# Altium PCB PCB1.PcbDoc
Units mm, origin at the board's own origin, x right, y up, seen from the top; angles counter-clockwise.
Board outline 121.87 x 131.67 mm, 2 copper layers (Top Layer, Bottom Layer), stack 1.534 mm thick; 49 components, 40 nets, 144 pads, 36 vias.
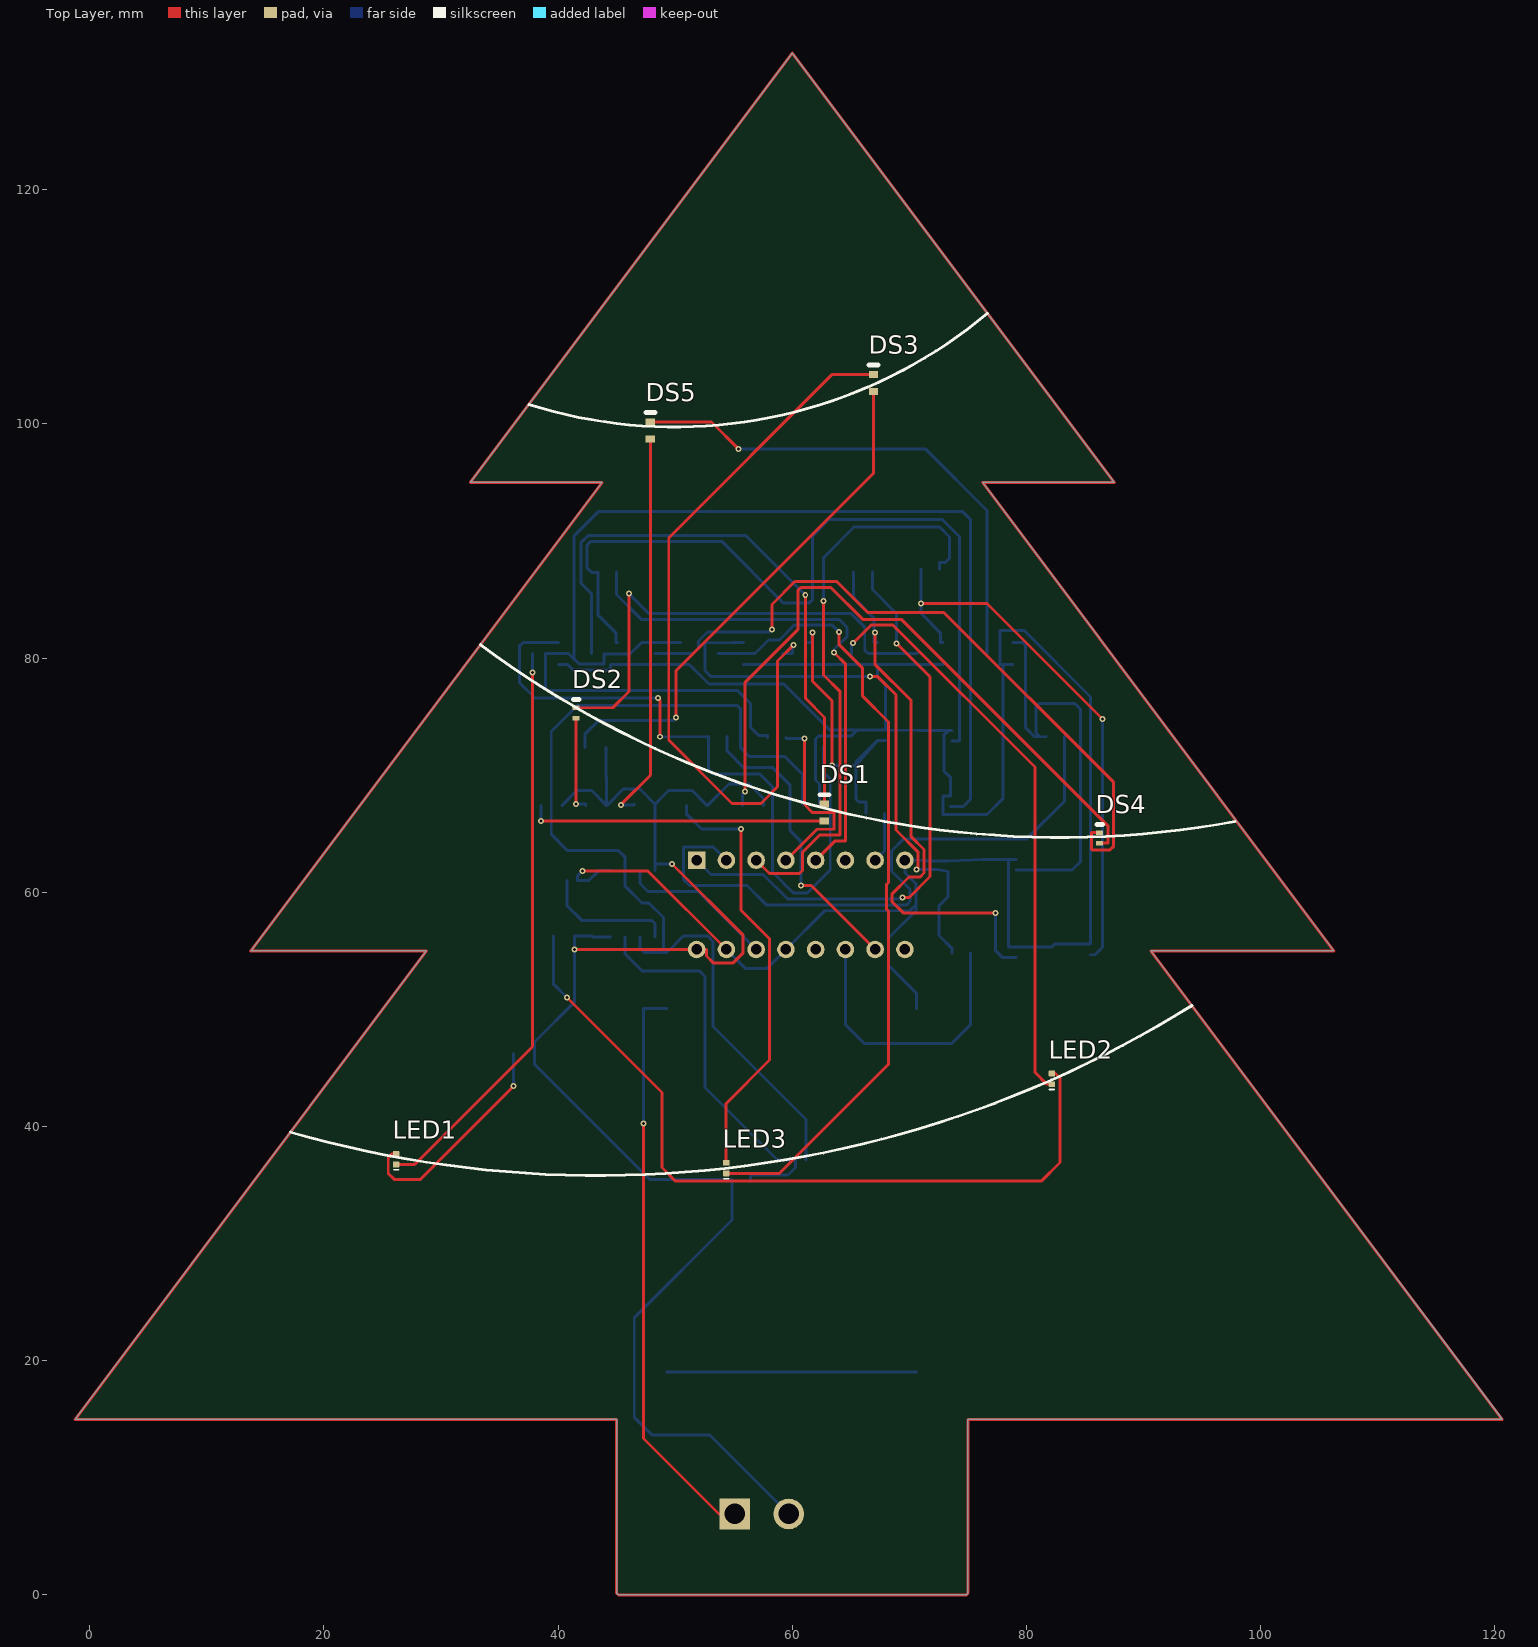
[diagram p0: Top Layer view]
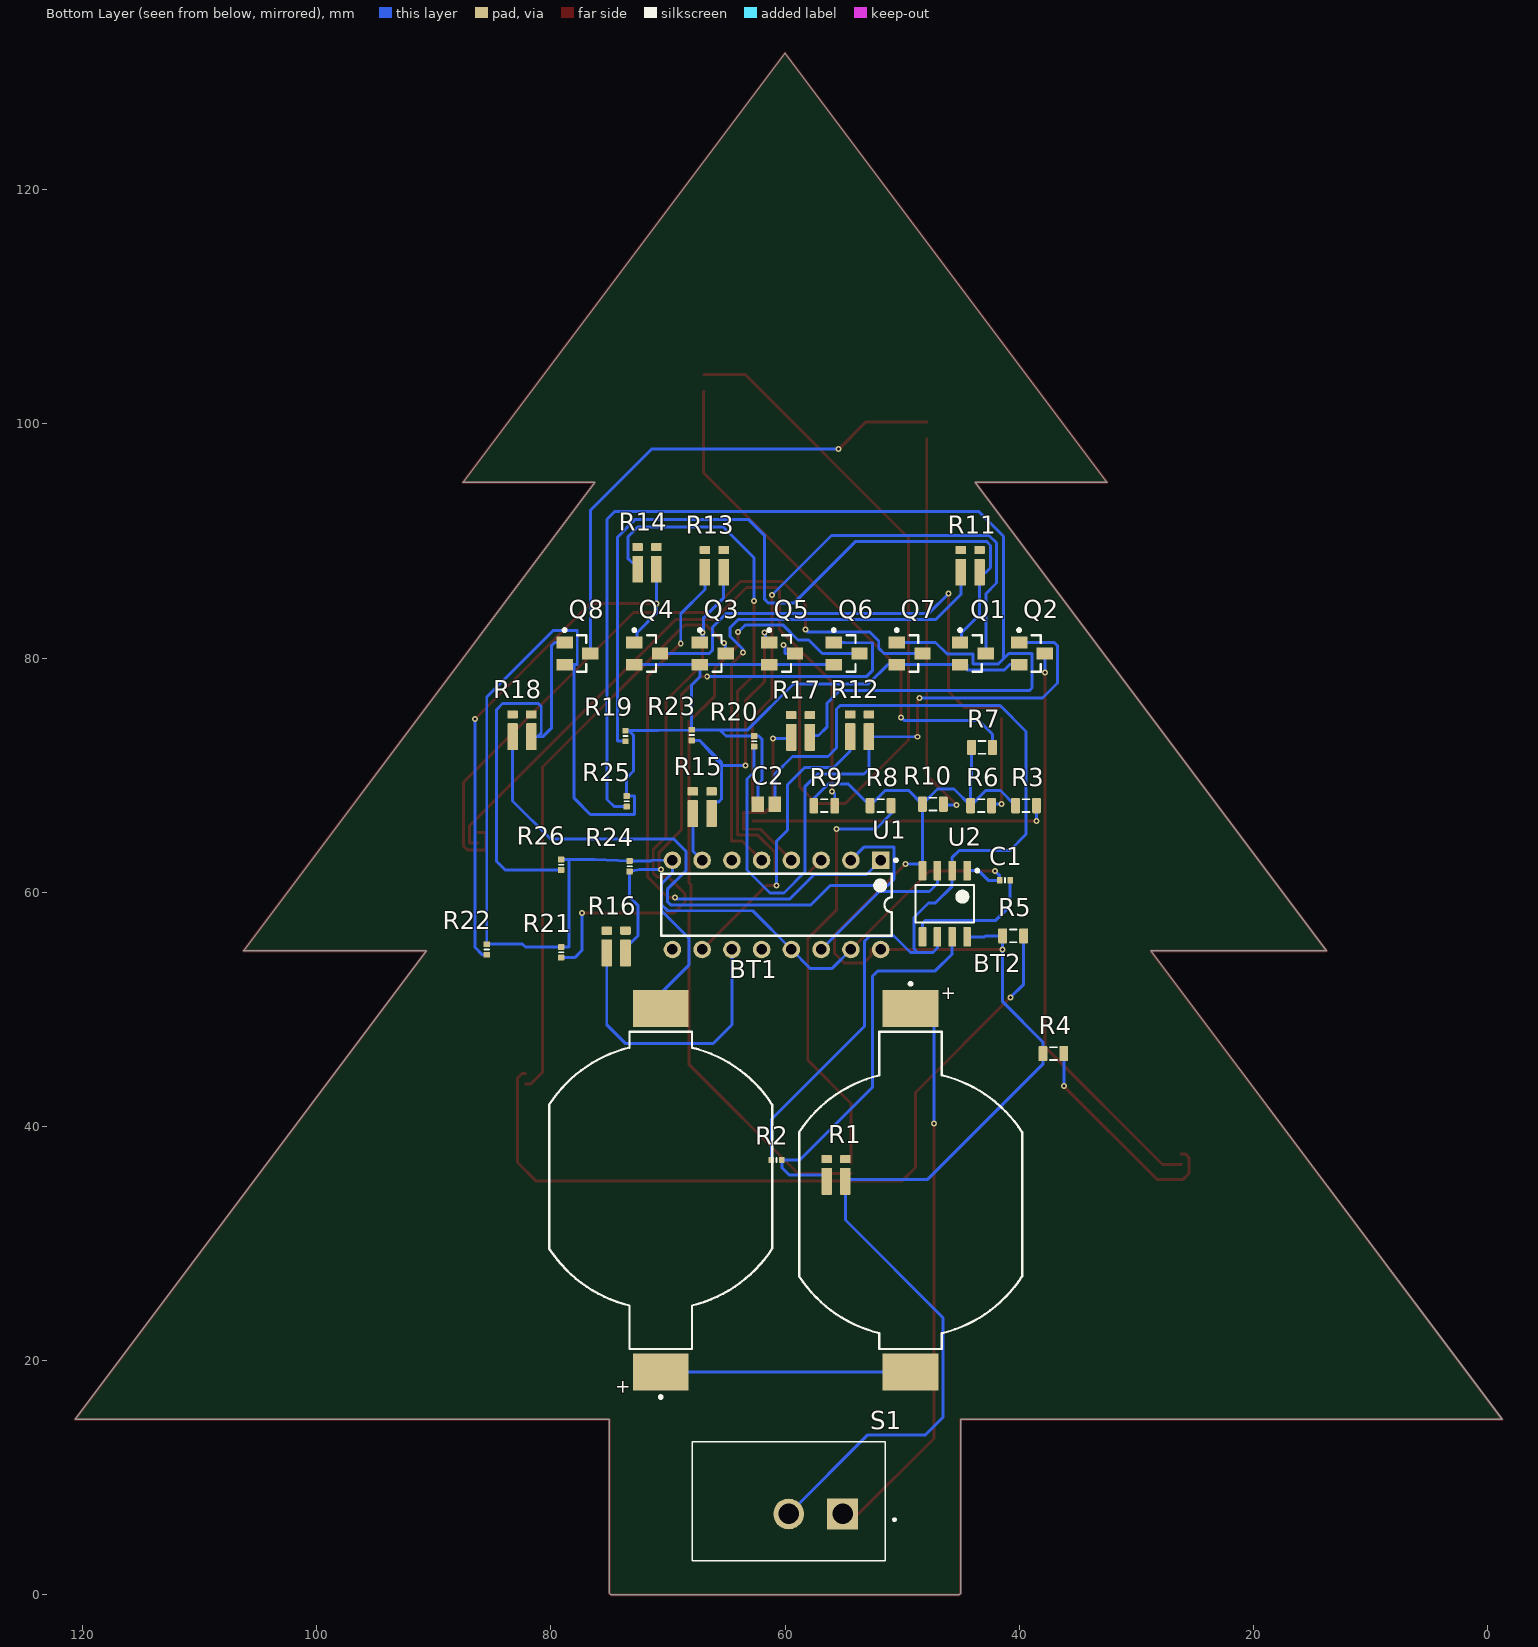
[diagram p1: Bottom Layer view, seen from below]
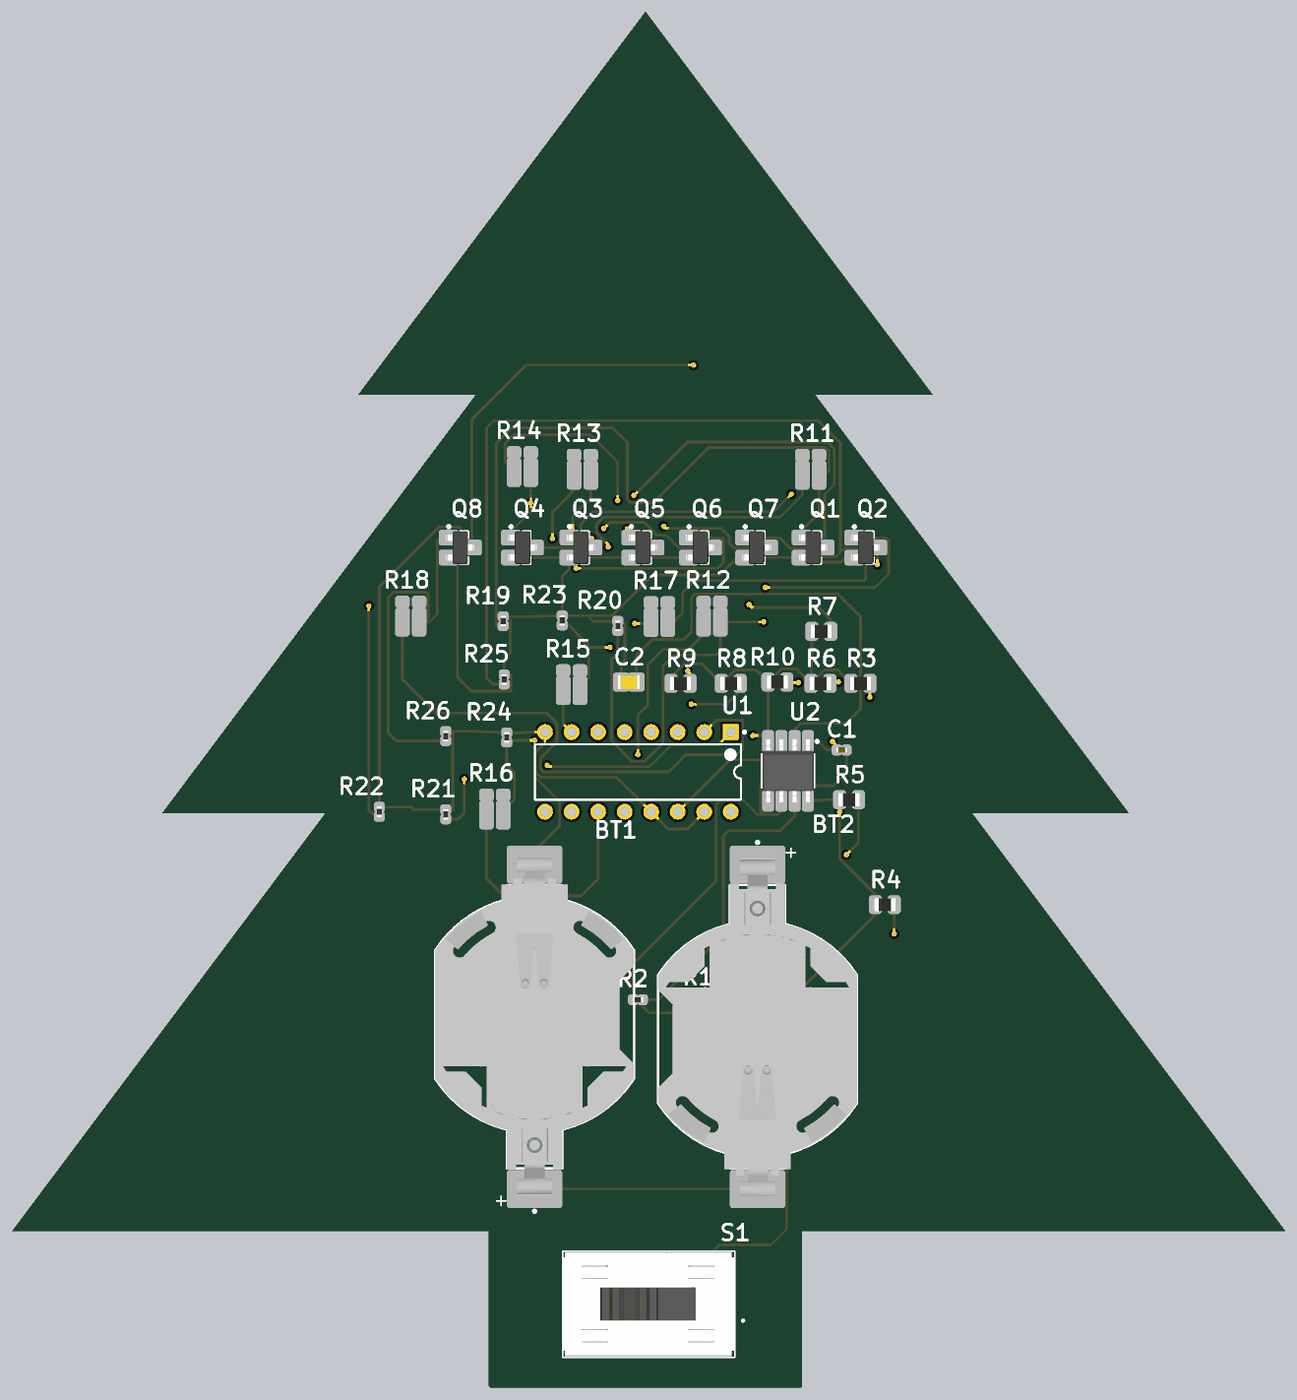
[diagram p2: 3D render of the assembled board from below, using the file's embedded part models]

## Layer stack, top to bottom
Top Solder: solder mask 0.0127, Solder Resist, Dk 3.3
Top Layer: signal copper 0.0178
Dielectric1: core 1.4986, FR-4, Dk 4.3
Bottom Layer: signal copper 0.0178
Bottom Solder: solder mask 0.0127, Solder Resist, Dk 3.3

## Board outline
7.5,15 45,15 45,0.149 45.149,0 74.851,0 75,0.149 75,15 112.5,15 120.625,15 90.625,55 106.25,55 76.25,95 87.5,95 60,131.667 32.5,95 43.75,95 13.75,55 28.75,55 -1.25,15

## Design rules (kind name [scope] priority, off if disabled: settings)
Clearance [All] p1: gap=0.254 ignorepadtopadclearanceinfootprint=FALSE
DiffPairsRouting [All] p1: maxlimit=0.254 minlimit=0.254 mostfreqgap=0.254 toplayer_minwidth=0.254 toplayer_maxwidth=0.254 toplayer_prefwidth=0.254 bottomlayer_minwidth=0.254 bottomlayer_maxwidth=0.254 bottomlayer_prefwidth=0.254 maxuncoupledlength=12.7
HoleSize [All] p1: absolutevalues=TRUE maxlimit=7.62 minlimit=0.254 maxpercent=80.000 minpercent=20.000
MinimumAnnularRing [All] p1: minimumring=0.254
PasteMaskExpansion [All] p1: expansion=0.254
PlaneClearance [All] p1: clearance=0.381
PlaneConnect [All] p1: pad.planeconnectstyle=Relief pad.reliefexpansion=0.508 pad.reliefentries=4 pad.reliefconductorwidth=0.254 pad.reliefairgap=0.254 via.planeconnectstyle=Direct via.reliefexpansion=0.508 via.reliefentries=4 via.reliefconductorwidth=0.254 via.reliefairgap=0.254
PolygonConnect [All] p1: thpad.connectstyle=Relief thpad.reliefconductorwidth=0.254 thpad.reliefentries=4 thpad.polygonreliefangle="90 Angle" thpad.airgapwidth=0.254 smdpad.connectstyle=Relief smdpad.reliefconductorwidth=0.254 smdpad.reliefentries=4 smdpad.polygonreliefangle="90 Angle" smdpad.airgapwidth=0.254 via.connectstyle=Direct via.reliefconductorwidth=0.254 via.reliefentries=4 via.polygonreliefangle="90 Angle" via.airgapwidth=0.254
RoutingVias [All] p1: holewidth=0.254 width=0.508 viastyle="Through Hole" minholewidth=0.254 minwidth=0.508 maxholewidth=0.254 maxwidth=0.508
SMDNeckDown [All] p1: percent=100.000
SilkToSolderMaskClearance SilkscreenOverComponentPads [IsPad] p1: minsilkscreentomaskgap=0.254 clearancetoexposedcopper=TRUE
SolderMaskExpansion [All] p1: expansion=0.254 istentingtop=FALSE
Width [All] p1: maxlimit=0.254 minlimit=0.254 preferedwidth=0.254
24 further rules are at their usual default settings.

## Components (designator, comment, footprint, x,y, rotation, side; value= is the part's Value field where it differs from the comment)
BT1 "796136-1" TECO-796136-1_V 70.612,34.544 r90 bottom
BT2 "796136-1" TECO-796136-1_V 49.276,34.544 r270 bottom
C1 "Capacitor 10nF +/-20% 50V 0402" CAPC0402(1005)60_L 41.217,61.024 r180 bottom value=10nF
C2 "Capacitor 100 nF +/-10% 50 V 0805" CAPC2013X95X50LL10T25 61.595,67.527 r180 bottom value=100nF
DS1 "TLMS1100-GS08" VISH-TLMX1100_V 62.738,66.802 r90 top
DS2 "16-219A/T2D-AR2T1QY/3T" EVRL-0402-2_V 41.529,75.311 r90 top
DS3 "TLMS1100-GS08" VISH-TLMX1100_V 66.929,103.505 r90 top
DS4 "16-219A/T2D-AR2T1QY/3T" EVRL-0402-2_V 86.233,64.643 r90 top
DS5 "TLMS1100-GS08" VISH-TLMX1100_V 47.879,99.441 r90 top
LED1 "QBLP595-IG" QTB-QBLP595_V 26.162,37.211 r90 top
LED2 "QBLP595-IG" QTB-QBLP595_V 82.169,44.069 r90 top
LED3 "QBLP595-IG" QTB-QBLP595_V 54.356,36.449 r90 top
Q1 "BSS138" FAIR-SOT23-3_V 43.953,80.391 r180 bottom
Q2 "BSS138" FAIR-SOT23-3_V 38.913,80.391 r180 bottom
Q3 "BSS138" FAIR-SOT23-3_V 66.173,80.391 r180 bottom
Q4 "BSS138" FAIR-SOT23-3_V 71.773,80.391 r180 bottom
Q5 "BSS138" FAIR-SOT23-3_V 60.245,80.391 r180 bottom
Q6 "BSS138" FAIR-SOT23-3_V 54.737,80.391 r180 bottom
Q7 "BSS138" FAIR-SOT23-3_V 49.358,80.391 r180 bottom
Q8 "BSS138" FAIR-SOT23-3_V 77.724,80.391 r180 bottom
R1 "KRL3216T4A-M-R007-F-T1" SUSUMU-3216T4A 55.643,35.869 r180 bottom value=7M
R2 "Resistor 1M +/-1 % 0402 63 mW" RESC0402(1005)_L 60.723,37.139 r180 bottom value=1M
R3 "Resistor 470R +/-5% 0805 125 mW" RESC0805(2012)_L 39.413,67.4 r180 bottom value=470
R4 "Resistor 470R +/-5% 0805 125 mW" RESC0805(2012)_L 37.084,46.228 r180 bottom value=470
R5 "Resistor 470R +/-5% 0805 125 mW" RESC0805(2012)_L 40.513,56.278 r180 bottom value=470
R6 "Resistor 470R +/-5% 0805 125 mW" RESC0805(2012)_L 43.248,67.4 r180 bottom value=470
R7 "Resistor 470R +/-5% 0805 125 mW" RESC0805(2012)_L 43.173,72.377 r180 bottom value=470
R8 "Resistor 470R +/-5% 0805 125 mW" RESC0805(2012)_L 51.833,67.4 r180 bottom value=470
R9 "Resistor 470R +/-5% 0805 125 mW" RESC0805(2012)_L 56.642,67.4 r180 bottom value=470
R10 "Resistor 470R +/-5% 0805 125 mW" RESC0805(2012)_L 47.371,67.527 r180 bottom value=470
R11 "KRL3216T4A-M-R007-F-T1" SUSUMU-3216T4A 44.189,87.884 r180 bottom value=7M
R12 "KRL3216T4A-M-R007-F-T1" SUSUMU-3216T4A 53.637,73.837 r180 bottom value=7M
R13 "KRL3216T4A-M-R007-F-T1" SUSUMU-3216T4A 66.04,87.884 r180 bottom value=7M
R14 "KRL3216T4A-M-R007-F-T1" SUSUMU-3216T4A 71.786,88.138 r180 bottom value=7M
R15 "KRL3216T4A-M-R007-F-T1" SUSUMU-3216T4A 67.073,67.273 r180 bottom value=7M
R16 "KRL3216T4A-M-R007-F-T1" SUSUMU-3216T4A 74.422,55.372 r180 bottom value=7M
R17 "KRL3216T4A-M-R007-F-T1" SUSUMU-3216T4A 58.674,73.787 r180 bottom value=7M
R18 "KRL3216T4A-M-R007-F-T1" SUSUMU-3216T4A 82.461,73.837 r180 bottom value=7M
R19 "2D26MR2F" RESC0402(1005)_L 73.622,73.352 r90 bottom value=2.26M
R20 "2D26MR2F" RESC0402(1005)_L 62.645,72.902 r90 bottom value=2.26M
R21 "2D26MR2F" RESC0402(1005)_L 79.121,54.872 r90 bottom value=2.26M
R22 "2D26MR2F" RESC0402(1005)_L 85.471,55.118 r90 bottom value=2.26M
R23 "2D26MR2F" RESC0402(1005)_L 67.973,73.427 r90 bottom value=2.26M
R24 "2D26MR2F" RESC0402(1005)_L 73.277,62.228 r90 bottom value=2.26M
R25 "2D26MR2F" RESC0402(1005)_L 73.522,67.773 r90 bottom value=2.26M
R26 "2D26MR2F" RESC0402(1005)_L 79.121,62.357 r90 bottom value=2.26M
S1 "GF-123-0054" SW_GF-123-0054 59.69,8.001 r0 bottom
U1 "CD4022BE" N0016A 60.723,58.928 r270 bottom
U2 "LM555CM/NOPB" D0008A_M 46.358,59.024 r270 bottom

## Footprints (in the part's own frame and the unit in brackets; to place one, negate y for a bottom-side part, rotate by r counter-clockwise, add the part's x,y. Pads: shape width x height; smd on the part's side, far side on the other; paste and mask are expansions set on the pad)
CAPC0402(1005)60_L [mm] "Chip Capacitor, Body 1.0x0.5mm, Height 0.6mm, IPC High Density"
  rrect25% 0.5x0.55 smd: 1(-0.45,0) 2(0.45,0)
  silkscreen extent 0,-0.2 0,0.2, body extent -0.5,-0.25 0.5,0.25, height 0.6
CAPC2013X95X50LL10T25 [mm] "Chip Capacitor, 2-Leads, Body 2.10x1.35mm, IPC High Density"
  rect 1.05x1.3 smd: 1(-0.725,0) 2(0.725,0)
  body extent -1.05,-0.67 1.05,0.67, height 0.95
D0008A_M [mm] "SOIC, 8-Leads, Body 5x4mm, Pitch 1.27mm, IPC Low Density"
  rrect15% 1.65x0.65 smd: 1(-2.825,1.905) 2(-2.825,0.635) 3(-2.825,-0.635) 4(-2.825,-1.905) 5(2.825,-1.905) 6(2.825,-0.635) 7(2.825,0.635) 8(2.825,1.905)
  silkscreen extent -2.95,-2.5 1.6,2.9, body extent -3,-2.45 3,2.45, height 1.63
EVRL-0402-2_V [mm] "SMD, 2-Leads, Body 1x0.5mm"
  rect 0.4x0.6 smd: 1(-0.45,0) 2(0.45,0)
  silkscreen extent 1.15,-0.25 1.15,0.25, body extent -0.5,-0.25 0.5,0.25, height 0.25
FAIR-SOT23-3_V [mm] "SOT23, 3-Leads, Body 3.12x1.5mm, Pitch 0.95mm"
  rect 1.4x1 smd: 1(-1.1,0.95) 2(-1.1,-0.95) 3(1.1,0)
  silkscreen extent -1.23,-1.55 0.75,2.12, body extent -1.35,-1.56 1.35,1.56, height 1.2
N0016A [mm] "DIP, 16-Leads, Body 19.7x6.6mm, Pitch 2.54mm"
  rect 1.5x1.5 hole 0.9: 1(-3.81,8.89)
  round 1.5 hole 0.9: 2(-3.81,6.35) 3(-3.81,3.81) 4(-3.81,1.27) 5(-3.81,-1.27) 6(-3.81,-3.81) 7(-3.81,-6.35) 8(-3.81,-8.89) 9(3.81,-8.89) 10(3.81,-6.35) 11(3.81,-3.81) 12(3.81,-1.27) 13(3.81,1.27) 14(3.81,3.81) 15(3.81,6.35) 16(3.81,8.89)
  silkscreen extent -3.93,-9.85 2.65,10.31, body extent -3.95,-9.85 3.95,9.85, height 5.08
QTB-QBLP595_V [mm] "SMD, 2-Leads, Body 1x0.5mm"
  rrect25% 0.5x0.55 smd: 1(-0.455,0) 2(0.455,0)
  silkscreen extent -0.9,-0.2 -0.9,0.2, body extent -0.5,-0.25 0.5,0.25, height 0.5
RESC0402(1005)_L [mm] "Chip Resistor, Body 1.0x0.5mm, IPC High Density"
  rrect25% 0.5x0.55 smd: 1(-0.45,0) 2(0.45,0)
  silkscreen extent 0,-0.2 0,0.2, body extent -0.5,-0.25 0.5,0.25, height 0.3
RESC0805(2012)_L [mm] "Chip Resistor, Body 2.0x1.3mm, IPC High Density"
  rrect25% 0.76x1.3 smd: 1(-0.9,0) 2(0.89,0)
  silkscreen extent -0.3,-0.55 0.3,0.55, body extent -1,-0.62 1,0.63, height 0.6
SUSUMU-3216T4A [mm] "SMD, 4-Leads, Body 3.2x1.6mm"
  rrect15% 0.9x2.3 smd: 1(-0.8,-0.55) 2(0.8,-0.55)
  rrect20% 0.9x0.7 smd: 3(-0.8,1.35) 4(0.8,1.35)
  body extent -0.8,-1.6 0.8,1.6, height 0.55
SW_GF-123-0054 [mm]
  rect 2.625x2.625 hole 1.75: 1(-4.6,1.09)
  round 2.625 hole 1.75: 2(0,1.09)
  silkscreen extent -9.14,-5.08 8.23,5.08, body extent -8.18,-5.11 8.28,5.05, height 13.22
TECO-796136-1_V [mm] "SMD, 2-Leads, Body 32.31x19.05mm"
  rect 3.15x4.78 smd: 1(-15.52,0) 2(15.52,0)
  silkscreen extent -17.77,-9.52 13.54,9.53, body extent -16.16,-9.53 16.17,9.52, height 6.52
VISH-TLMX1100_V [mm] "SMD, 2-Leads, Body 1.6x0.8mm"
  rect 0.6x0.8 smd: 1(-0.725,0) 2(0.725,0)
  silkscreen extent 1.52,-0.4 1.52,0.4, body extent -0.8,-0.4 0.8,0.4, height 0.65

## Part data
BT1 BT2: library part CMP-002-00002-2, "Battery Connector, 1 Cell, CR2032, 2-Pin SMD, RoHS, Tape and Reel", Colour=Black, Manufacturer="TE Connectivity", Max Voltage Rating (AC)=30V, Package Description="2-Pin Surface Mount Device, Body 32.31 x 19.05 mm", Package Quantity=400, Batteries=1, Case/Package=796136-1, Connector Type=BatteryHolder, Contact Material=Bronze, Contact Plating=Tin, Datasheet URL=http://www.te.com/commerce/DocumentDelivery/DDEController?Action=srchrtrv&DocNm=796136&DocType=Customer+Drawing&DocLang=English&DocFormat=pdf&PartCntxt=796136-1, Datasheet Version=Dec-13, Manufacturer URL=http://www.te.com/, Mounting Technology=SM, Package Reference=796136-1, Packaging=TapeandReel, Pins=2, RoHS Compliant=True
C1: library part CMP-001-00069-3, "Chip Capacitor, 10nF +/-20%, 50V, 0402, Thickness 0.6 mm", Case/Package=0402, Max Operating Temperature=85°C, Min Operating Temperature=-55°C, Tolerance=5%, Voltage Rating=50V, Mounting Technology=SMT, Pins=2
C2: library part CMP-001-00018-6, "Chip Capacitor, 100 nF, +/- 10%, 50 V, 0805 (2012 Metric)", Capacitor Type=Ceramic, Case/Package=0805, Max Operating Temperature=125°C, Min Operating Temperature=-55°C, Tolerance=10%, Voltage Rating=50V, Mounting Technology=SM, Pins=2, RoHS Compliant=True
DS1 DS3 DS5: library part CMP-007-00030-2, "Red Led, 20mA, 2.1 V, -40 to 100 degC, 2-Pin SMD (0603), RoHS, Tape and Reel", Case/Package=0603, Colour=Red, Forward Current=20mA, Forward Voltage=2.1V, Manufacturer="Vishay Semiconductor", Max Operating Temperature=100°C, Min Operating Temperature=-40°C, Package Description="2-Pin Surface Mount Device, Body 1.6 x 0.8 mm", Package Quantity=3000, Package Reference=TLMX1100, Power=90mW, Datasheet URL=http://www.vishay.com/docs/83173/tlmb1100.pdf, Datasheet Version="Rev. 2.7, 03/2016", Illumination Colour=Red, Lens Style=Clear, Luminous Intensity=63mcd, Manufacturer URL=http://www.vishay.com/, Mounting Technology=SM, Nominal Vf=2.1V, Packaging=TapeandReel, Pins=2, RoHS Compliant=True, Viewing Angle=160degrees
DS2 DS4: library part CMP-007-00000-2, "Chip LED, White, 5 V, 10 mA, 30 mW, -40 to 85 degC, 2-Pin SMD (0402), RoHS, Tape and Reel", Case/Package=0402, Forward Current=5mA, Forward Voltage=2.6V, Illumination Colour=White, Manufacturer="Everlight Electronics", Max Operating Temperature=85°C, Min Operating Temperature=-40°C, Package Description="2-Pin Surface Mount Device, Body 1 x 0.5 mm", Package Quantity=3000, Power=30mW, Datasheet URL=http://www.everlight.com/file/ProductFile/16-219A-T2D-AR2T1QY-3T.pdf, Datasheet Version="Rev. 5, 04/2013", Luminous Intensity=360mcd, Manufacturer URL=http://www.everlight.com/, Mounting Technology=SM, Package Reference=0402, Packaging=TapeandReel, RoHS Compliant=True, Viewing Angle=130degrees
LED1 LED2 LED3: library part CMP-007-00041-3, "Chip LED 0402, Green, 0.02 A, 3.1 to 3.7 V, -40 to 80 degC, 2-Pin SMD, RoHS, Tape and Reel", Case/Package=0402, Colour=Green, Mounting Technology=SMT, Pins=2, RoHS Compliant=Yes
Q1 Q2 Q3 Q4 Q5 Q6 Q7 Q8: library part CMP-013-00021-4, "N-Channel Logic Level Enhancement Mode Field Effect Transistor, 220 mA, 50 V, -55 to 150 degC, 3-Pin SOT-23, RoHS, Tape and Reel", Case/Package=TO-236-3, Input Capacitance=27pF, Manufacturer=Fairchild, Max Operating Temperature=150°C, Min Operating Temperature=-55°C, Nominal Dual Supply Voltage=50V, Package Description="3-Pin Small Outline Transistor, Body 2.92 x 1.325 mm, Pitch 0.95 mm", Package Quantity=1, Package Reference=SOT23-3, Package Version="Rev. 12, 03/2016", Power=360mW, Resistance=0.7Ohm, Datasheet URL=https://www.fairchildsemi.com/datasheets/BS/BSS138.pdf, Datasheet Version="Rev. C, 10/2005", Elements=1, Mounting Technology=SM, Nominal Vgs=1.3V, Packaging=TapeandReel, Pins=3, Rds On Max=3.5Ohm, RoHS Compliant=True, Typical Rise Time=9ns
R1 R11 R12 R13 R14 R15 R16 R17 R18: library part CMP-009-00115-2, "RES SMD 0.007 OHM 1W 1206 WIDE", Case/Package=1206, Max Operating Temperature=155°C, Min Operating Temperature=-55°C, Tolerance=1%, Mounting Technology=SMT, Pins=4
R2: library part CMP-009-00165-3, "Chip Resistor, 1 MOhms, +/-1 %, 63 mW, -55 to 155 degC, 0402", Case/Package=0402, Power=63mW, Tolerance=1%, Pins=2
R3 R4 R5 R6 R7 R8 R9 R10: library part CMP-009-00122-3, "Chip Resistor, 470 Ohms, +/-5%, 125 mW, -55 to 155 degC, 0805", Case/Package=0805, Max Operating Temperature=155°C, Min Operating Temperature=-55°C, Power=125mW, Tolerance=5%, Pins=2
R19 R20 R21 R22 R23 R24 R25 R26: library part CMP-009-00086-2, "2M26 0.063W 1% 0402 (1005 Metric)  SMD", Case/Package=0402, Power=63mW, Tolerance=1%, Mounting Technology=SMT, Pins=2
S1: library part CMP-011-00013-2, "Slide Switch SPST Through Hole", Case/Package=None, Availability=Unavailable, Component Type=Standard, Design Item ID=GF-123-0054, MP=GF-123-0054, Pins=2, Price=None, Source=GF-123-0054.SchLib
U1: library part CMP-1623-00536-2, "CMOS Octal Counter with 8 Decoded Outputs, N0016A, TUBE", F @ Nom Voltage(Max)(Mhz)=8, Generic Part Number=CD4022B, ICC @ Nom Voltage(Max)(mA)=0.03, Manufacturer="Texas Instruments", Operating Temperature Range(C)="-55 to 125", Rating=Catalog, tpd @ Nom Voltage(Max)(ns)=270, Voltage(Nom)(V)=5,10,15, Bits(#)=10, Code_JEDEC=MS-001, DatasheetVersion=SCHS027C, Function=Counter, Input Type=CMOS, Inputs=1, Output Drive (IOL/IOH)(Max)(mA)=1.5/-1.5, Output Type=CMOS, PackageReference=N0016A, Schmitt Trigger=No, Technology Family=CD4000, Type=Decade, VCC(Max)(V)=18, VCC(Min)(V)=3
U2: library part CMP-0056-00105-3, "Timer, 8-pin Narrow SOIC, Pb-Free", Manufacturer="Texas Instruments", PackageTopMarking=NSZXTT*LM*555CM, PowerWise=N, Code_IPC=SOIC127P600-8, Code_JEDEC=MS-012-AA, ComponentLink1Description="Datasheet URL", ComponentLink1URL=http://www.ti.com/general/docs/lit/getliterature.tsp?genericPartNumber=LM555&fileType=pdf, CompType="Analog IC", PackageDescription="SOIC Narrow, 4.9 x 3.9 x 1.45mm, 8 Lead, 1.27mm Pitch", PackageReference=D0008A, PinCount=8, RoHS=Y

## Via types
v1: diameter 0.508, hole 0.254, Top Layer to Bottom Layer, 36 vias

## Nets (pads, with @x,y where several pads share a name; then routed paths per layer and width w, separated by ;. In a path a pad name is that pad's centre, name@x,y a point inside that pad or via, vN(x,y) a via of type N, cw(c..) or ccw(c..) an arc to the next point about the centre after c; other vN are vias at no path point)
GND: BT1.2 C1.1 C2.1 Q1.2 Q2.2 Q3.2 Q4.2 Q5.2 Q6.2 Q7.2 Q8.2 R19.2 R20.2 R21.2 R22.2 R23.2 R24.2 R25.2 R26.2 U1.8 U1.13 U1.15 U2.1 | length 207.1
  Top Layer w0.254: v1(42.08,61.828) 47.663,61.828 U1.15
  Bottom Layer w0.254: Q2.2 40.825,79.441 41.264,79.002 44.461,79.002 44.461,79.441 Q1.2 Q7.2 51.224,79.441 52.886,77.779 59.276,77.779 63.178,73.877 65.567,73.877 ; v1(42.08,61.828) 41.667,61.414 C1.1 42.639,61.024 43.464,61.849 U2.1 ; U1.15 56.012,53.479 57.814,53.479 U1.13 62.76,58.424 70.02,58.424 70.554,58.958 ; Q6.2 Q5.2 Q3.2 ; C2.1 62.32,69.249 61.969,69.6 61.969,73.08 62.241,73.352 R20.2 65.042,73.352 65.567,73.877 ; BT1.2 70.612,51.381 68.217,53.776 68.217,56.088 70.554,58.424 70.554,58.958 ; Q4.2 Q3.2 ; R19.2 73.322,73.802 ; Q8.2 78.007,79.441 ; R26.2 78.453,62.807 ; 65.567,73.877 R23.2 ; Q3.2 67.273,79.068 67.277,79.068 67.277,78.389 67.973,77.693 R23.2 ; R23.2 70.832,73.802 73.322,73.802 ; 70.554,58.958 70.554,60.74 69.613,61.681 U1.8 71.392,62.738 71.452,62.678 R24.2 76.245,62.807 78.453,62.807 ; 73.322,73.802 72.941,73.421 72.941,70.362 73.522,69.782 R25.2 72.865,68.223 72.865,66.654 76.624,66.654 78.007,68.036 78.007,79.441 ; 78.007,79.441 77.742,79.441 77.742,82.377 79.774,82.377 85.471,76.68 R22.2 82.408,55.568 82.162,55.322 R21.2 78.453,55.322 78.453,62.807
NetBT1_1: BT1.1 BT2.2 | length 21.3
  Bottom Layer w0.254: BT2.2 BT1.1
NetBT2_1: BT2.1 S1.1 | length 49.2
  Top Layer w0.254: v1(47.287,40.263) 47.287,13.365 53.741,6.911 S1.1
  Bottom Layer w0.254: v1(47.287,40.263) 47.287,50.064 BT2.1
NetC1_2: C1.2 U2.5 | length 11.4
  Bottom Layer w0.254: C1.2 40.767,58.856 42.011,57.612 47.983,57.612 48.263,57.332 U2.5
NetC2_2: C2.2 R2.1 U2.2 U2.6 | length 85.2
  Bottom Layer w0.254: U2.6 46.993,55.239 47.364,54.868 48.684,54.868 ; C2.2 60.87,70.089 59.352,71.607 56.33,71.607 55.593,72.344 55.593,75.646 55.288,75.95 41.623,75.95 39.413,73.741 39.413,64.952 40.785,63.581 45.128,63.581 45.723,62.986 U2.2 45.723,60.523 47.16,59.085 47.745,59.085 48.989,57.84 48.989,55.173 48.684,54.868 ; R2.1 61.173,40.601 53.231,48.544 53.231,55.808 52.774,56.265 50.691,56.265 49.294,54.868 48.684,54.868
NetDS1_1: DS1.1 R3.2 | length 25.5
  Top Layer w0.254: v1(38.524,66.077) DS1.1
  Bottom Layer w0.254: R3.2 38.523,66.078 v1(38.524,66.077)
NetDS1_2: DS1.2 Q1.3 | length 49.9
  Top Layer w0.254: v1(61.105,85.399) 61.105,76.585 62.756,74.934 62.756,67.527 DS1.2
  Bottom Layer w0.254: Q1.3 42.842,80.391 42.842,85.501 41.938,86.405 41.938,89.844 42.573,90.479 56.025,90.479 v1(61.105,85.399)
NetDS2_1: DS2.1 R6.2 | length 8.3
  Top Layer w0.254: v1(41.522,67.543) 41.522,74.861 DS2.1
  Bottom Layer w0.254: v1(41.522,67.543) 42.358,67.543 R6.2
NetDS2_2: DS2.2 Q4.3 | length 41.3
  Top Layer w0.254: DS2.2 44.66,75.761 46.043,77.144 v1(46.043,85.501)
  Bottom Layer w0.254: v1(46.043,85.501) 47.719,83.824 64.991,83.824 66.185,82.631 66.185,80.67 66.464,80.391 Q4.3
NetDS3_1: DS3.1 R7.2 | length 44.4
  Top Layer w0.254: v1(50.081,74.934) 50.081,78.943 66.947,95.808 66.947,102.78 DS3.1
  Bottom Layer w0.254: R7.2 42.283,73.493 43.445,74.655 49.802,74.655 v1(50.081,74.934)
NetDS3_2: DS3.2 Q5.3 | length 67
  Top Layer w0.254: v1(60.114,81.132) 58.743,79.76 58.743,69.016 57.32,67.594 54.857,67.594 49.446,73.004 49.446,90.26 63.416,104.23 DS3.2
  Bottom Layer w0.254: Q5.3 60.013,80.391 60.013,81.03 v1(60.114,81.132)
NetDS4_1: DS4.1 R9.2 | length 57.5
  Top Layer w0.254: v1(55.974,68.61) 55.974,77.929 60.47,82.424 60.47,85.78 60.724,86.034 63.289,86.034 66.007,83.316 69.309,83.316 86.937,65.689 86.937,64.193 DS4.1
  Bottom Layer w0.254: R9.2 55.752,68.388 v1(55.974,68.61)
NetDS4_2: DS4.2 Q7.3 | length 60.1
  Top Layer w0.254: v1(58.26,82.427) 58.26,84.586 60.216,86.542 63.797,86.542 66.439,83.901 72.941,83.901 87.445,69.397 87.445,63.936 87.115,63.606 85.616,63.606 85.54,63.682 85.54,65.093 DS4.2
  Bottom Layer w0.254: Q7.3 51.555,80.391 51.995,80.831 51.995,81.462 52.757,82.224 58.057,82.224 v1(58.26,82.427)
NetDS5_1: DS5.1 R10.2 | length 33.5
  Top Layer w0.254: v1(45.357,67.467) 47.897,70.007 47.897,98.716 DS5.1
  Bottom Layer w0.254: v1(45.357,67.467) 46.481,67.467 R10.2
NetDS5_2: DS5.2 Q8.3 | length 44.1
  Top Layer w0.254: DS5.2 53.095,100.166 v1(55.415,97.845)
  Bottom Layer w0.254: v1(55.415,97.845) 71.392,97.845 76.624,92.613 Q8.3
NetLED1_1: LED1.1 Q2.3 | length 49.4
  Top Layer w0.254: LED1.1 27.755,36.756 37.813,46.814 v1(37.813,78.77)
  Bottom Layer w0.254: v1(37.813,78.77) Q2.3
NetLED1_2: LED1.2 R4.2 | length 19.1
  Top Layer w0.254: LED1.2 25.824,37.666 25.494,37.336 25.494,35.996 26.002,35.488 28.237,35.488 v1(36.194,43.445)
  Bottom Layer w0.254: v1(36.194,43.445) R4.2
NetLED2_1: LED2.1 Q3.3 | length 50.1
  Top Layer w0.254: v1(65.194,81.284) 66.718,82.808 68.598,82.808 80.714,70.693 80.714,44.632 81.732,43.614 LED2.1
  Bottom Layer w0.254: Q3.3 65.067,80.391 65.067,81.284 v1(65.194,81.284)
NetLED2_2: LED2.2 R5.2 | length 66.8
  Top Layer w0.254: v1(40.76,51.008) 48.862,42.905 48.862,36.504 50.031,35.336 81.247,35.336 82.847,36.936 82.847,44.143 82.466,44.524 LED2.2
  Bottom Layer w0.254: R5.2 39.623,52.144 v1(40.76,51.008)
NetLED3_1: LED3.1 Q6.3 | length 68.1
  Top Layer w0.254: LED3.1 58.893,35.994 68.217,45.318 68.217,58.382 68.023,58.576 68.023,60.651 68.217,60.845 68.217,74.538 66.007,76.748 66.007,79.128 64.001,81.135 v1(64.001,82.224)
  Bottom Layer w0.254: Q6.3 56.812,80.391 57.975,81.554 58.894,81.554 60.148,82.808 63.416,82.808 v1(64.001,82.224)
NetLED3_2: LED3.2 R8.2 | length 37
  Top Layer w0.254: LED3.2 54.356,41.973 58.057,45.674 58.057,56.037 55.619,58.475 v1(55.619,65.409)
  Bottom Layer w0.254: R8.2 50.943,66.706 52.24,65.409 v1(55.619,65.409)
NetQ1_1: Q1.1 R11.2 R19.1 | length 68.8
  Bottom Layer w0.254: R11.2 R11.2@43.389,87.33 ; Q1.1 44.925,81.341 44.925,82.161 43.389,83.697 R11.2@43.389,87.33 ; R19.1 74.288,72.902 74.288,90.352 72.789,91.851 63.137,91.851 61.74,90.454 61.74,85.018 61.41,84.688 59.251,84.688 53.968,89.971 42.792,89.971 42.446,89.626 42.446,87.726 42.842,87.33 R11.2@43.389,87.33
NetQ2_1: Q2.1 R12.2 R20.1 | length 59.9
  Top Layer w0.254: v1(48.532,76.585) 48.684,76.433 v1(48.684,73.283)
  Bottom Layer w0.254: Q2.1 37,81.341 36.721,81.062 36.721,77.881 38.016,76.585 v1(48.532,76.585) ; v1(48.684,73.283) R12.2@52.837,73.283 ; R12.2 R12.2@52.837,73.283 ; R20.1 62.645,70.278 63.239,69.685 63.239,61.904 61.283,59.948 60.089,59.948 58.311,61.726 58.311,69.016 57.219,70.108 53.256,70.108 52.837,70.528 R12.2@52.837,73.283
NetQ3_1: Q3.1 R13.2 R21.1 | length 48.7
  Top Layer w0.254: v1(67.049,82.173) 67.049,79.481 70.154,76.376 70.154,64.752 71.252,63.653 71.252,61.65 70.914,61.312 69.971,61.312 68.531,59.872 68.531,59.177 69.462,58.247 v1(77.336,58.247)
  Bottom Layer w0.254: R13.2 65.24,85.145 66.972,83.413 66.972,81.341 Q3.1@67.074,81.341 ; v1(67.049,82.173) 67.074,82.148 Q3.1@67.074,81.341 ; Q3.1 Q3.1@67.074,81.341 ; v1(77.336,58.247) 77.336,55.046 77.96,54.422 R21.1
NetQ4_1: Q4.1 R14.2 R22.1 | length 47.5
  Top Layer w0.254: v1(70.986,84.663) 76.624,84.663 v1(86.48,74.807)
  Bottom Layer w0.254: R14.2 v1(70.986,84.663) 70.986,83.824 72.637,82.174 72.637,81.341 Q4.1 ; R22.1 85.847,54.668 86.48,55.3 v1(86.48,74.807)
NetQ5_1: Q5.1 R15.2 R23.1 | length 26.5
  Top Layer w0.254: v1(61.74,82.173) 61.74,78.008 63.391,76.357 v1(63.391,70.845)
  Bottom Layer w0.254: Q5.1 61.664,81.341 61.664,82.097 v1(61.74,82.173) ; v1(63.391,70.845) 65.423,70.845 ; R15.2 66.273,67.695 65.702,67.695 65.423,67.975 65.423,70.845 ; R23.1 67.301,72.977 ; 65.423,70.845 65.423,71.099 67.301,72.977 ; 65.423,70.845 67.301,72.977
NetQ6_1: Q6.1 R16.2 R24.1 | length 49
  Top Layer w0.254: v1(66.642,78.414) 67.303,78.414 68.852,76.865 68.852,65.321 70.744,63.428 70.744,62.095 v1(70.605,61.955)
  Bottom Layer w0.254: Q6.1 54.888,81.341 52.545,81.284 52.545,78.922 53.053,78.414 v1(66.642,78.414) ; v1(70.605,61.955) 72.434,61.955 R24.1 73.277,59.598 72.535,58.856 72.535,56.311 73.622,55.224 R16.2
NetQ7_1: Q7.1 R17.2 R25.1 | length 109.4
  Bottom Layer w0.254: Q7.1 47.141,81.341 46.144,80.345 43.935,80.345 43.935,79.51 41.776,79.51 41.344,79.942 ; R17.2 57.874,73.385 57.143,73.385 56.431,74.096 56.431,76.128 55.339,77.22 39.134,77.22 38.905,77.449 38.905,80.395 40.89,80.395 41.344,79.942 ; R25.1 74.591,67.323 75.202,67.934 75.202,91.851 74.516,92.537 43.477,92.537 41.344,90.403 41.344,79.942
NetQ8_1: Q8.1 R18.2 R26.1 | length 35.9
  Bottom Layer w0.254: Q8.1 79.672,81.341 79.926,81.087 79.926,74.045 80.688,73.283 81.12,73.283 ; R26.1 83.892,61.907 84.625,62.641 84.625,75.62 84.117,76.128 81.069,76.128 80.815,75.874 80.815,73.588 81.12,73.283 ; R18.2 81.661,73.283 81.12,73.283
NetR1_1: R1.1 R2.2 U2.7 | length 34.1
  Bottom Layer w0.254: U2.7 45.723,54.731 47.16,53.294 52.063,53.294 52.545,52.811 52.545,43.337 58.743,37.139 R2.2 60.273,36.504 59.638,35.869 56.443,35.869 R1.1
NetR11_1: R11.1 U1.5 | length 45.1
  Top Layer w0.254: U1.5 63.623,64.368 64.559,64.368 64.559,79.481 v1(63.569,80.472)
  Bottom Layer w0.254: R11.1 44.989,85.425 47.097,83.316 63.975,83.316 64.686,82.605 64.686,81.843 63.569,80.726 v1(63.569,80.472)
NetR12_1: R12.1 U1.10 | length 25.4
  Top Layer w0.254: v1(60.724,60.583) 61.608,60.583 U1.10
  Bottom Layer w0.254: R12.1 54.437,72.064 55.859,70.642 58.336,70.642 59.784,69.194 59.784,65.308 60.724,64.368 v1(60.724,60.583)
NetR13_1: R13.1 U1.1 | length 50.1
  Top Layer w0.254: v1(68.903,81.259) 71.76,78.401 71.76,61.345 69.983,59.567 v1(69.411,59.567)
  Bottom Layer w0.254: U1.1 53.048,61.523 57.498,61.523 59.581,59.44 69.284,59.44 v1(69.411,59.567) ; R13.1 66.84,85.856 68.903,83.794 v1(68.903,81.259)
NetR14_1: R14.1 U1.3 | length 49.7
  Top Layer w0.254: U1.3 58.052,61.599 60.597,61.599 60.862,61.865 60.862,63.414 62.324,64.876 64.051,64.876 64.051,77.17 62.654,78.567 v1(62.654,84.891)
  Bottom Layer w0.254: v1(62.654,84.891) 62.654,88.574 65.271,91.19 72.586,91.19 73.424,90.352 73.424,88.523 73.068,88.168 72.586,88.168 R14.1
NetR15_1: R15.1 U1.7 | length 4.3
  Bottom Layer w0.254: U1.7 67.873,63.538 R15.1
NetR16_1: R16.1 U1.11 | length 24.6
  Bottom Layer w0.254: U1.11 64.533,48.696 66.159,47.071 73.596,47.071 75.222,48.696 R16.1
NetR17_1: R17.1 U1.4 | length 16.7
  Top Layer w0.254: U1.4 62.099,65.384 63.543,65.384 63.543,66.832 61.689,66.832 61.029,67.492 v1(61.029,73.131)
  Bottom Layer w0.254: R17.1 59.474,73.131 v1(61.029,73.131)
NetR18_1: R18.1 U1.2 | length 54.3
  Bottom Layer w0.254: U1.2 53.226,63.885 50.691,63.885 50.691,61.117 51.224,60.583 56.127,60.583 57.778,58.932 69.766,58.932 70.046,59.212 70.046,60.254 68.471,61.829 68.471,63.53 69.512,64.571 80.028,64.571 83.261,67.804 R18.1
NetU1_14: U1.14 U2.3 | length 13.4
  Bottom Layer w0.254: U2.3 46.993,60.751 47.668,60.075 51.956,60.075 U1.14
VCC: R1.2 R3.1 R4.1 R5.1 R6.1 R7.1 R8.1 R9.1 R10.1 S1.2 U1.16 U2.4 U2.8 | length 136.9
  Top Layer w0.254: v1(41.413,55.118) U1.16 52.672,55.118 52.672,54.564 53.256,53.979 54.958,53.979 55.771,54.792 55.771,56.367 v1(49.726,62.412)
  Bottom Layer w0.254: R3.1 41.599,68.686 42.862,68.686 R6.1 ; R7.1 44.073,69.904 44.148,69.829 R6.1 ; U2.8 42.972,56.199 42.893,56.278 R5.1 v1(41.413,55.118) 41.413,50.652 37.984,47.223 R4.1 37.984,45.318 47.814,35.488 54.843,35.488 R1.2 54.843,32.008 46.5,23.665 46.5,15.168 47.999,13.67 52.931,13.67 S1.2 ; U2.4 U2.4@48.263,62.412 ; v1(49.726,62.412) U2.4@48.263,62.412 ; R9.1 57.542,68.022 56.304,69.259 54.593,69.259 R8.1 51.447,68.686 49.43,68.686 R10.1 ; R6.1 45.561,68.813 46.985,68.813 R10.1 ; U2.4@48.263,62.412 48.263,64.673 48.271,64.681 R10.1
pads on no net: R1.3 R1.4 R11.3 R11.4 R12.3 R12.4 R13.3 R13.4 R14.3 R14.4 R15.3 R15.4 R16.3 R16.4 R17.3 R17.4 R18.3 R18.4 U1.6 U1.9 U1.12
copper on no net: | length 496.5
  Top Layer w0.254: -1.25,15 28.75,55 13.75,55 43.75,95 32.5,95 60,131.667 87.5,95 76.25,95 106.25,55 90.625,55 120.625,15 112.5,15 75,15 75,0.149 74.851,0 45.149,0 45,0.149 45,15 7.5,15 -1.25,15

## Silkscreen, mask and mechanical layers (free items; w line width, h text height)
Top Overlay:
  lines w0.254: 17.134,39.511 ccw(c43.471,131.424) 94.125,50.333 ; 33.366,81.155 ccw(c82.893,147.401) 97.79,66.04 ; 37.494,101.658 ccw(c49.975,141.286) 76.665,109.446

## Text inside footprints (layer, text, board x,y; h text height)
BT1: Bottom Overlay "+" at 73.36,17.073 h1.15 r270
BT2: Bottom Overlay "+" at 46.528,52.015 h1.15 r90